# EAGLE board MiniWhip (EAGLE 7.7.0)
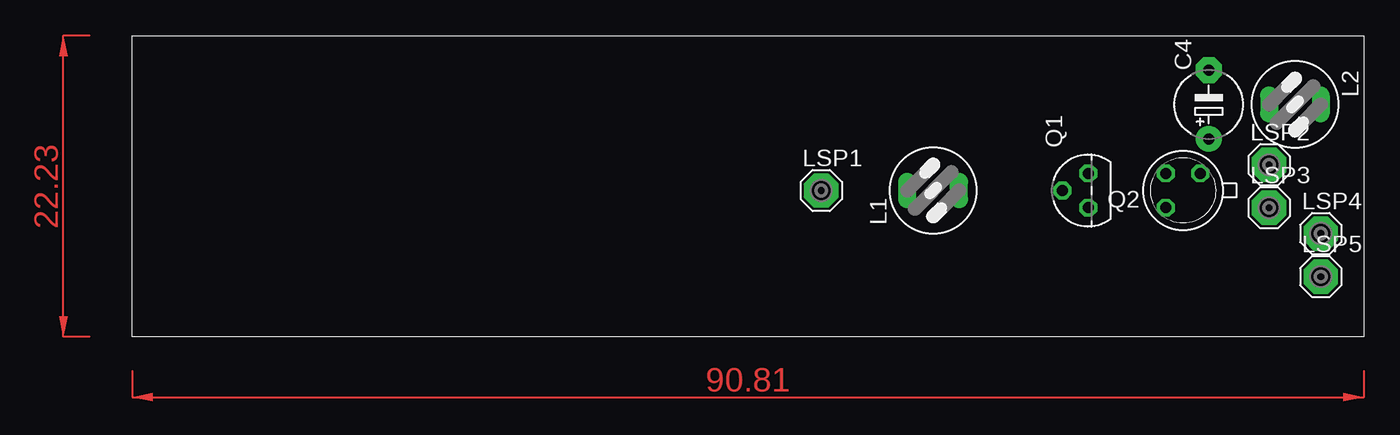
[diagram p0: board, top side]
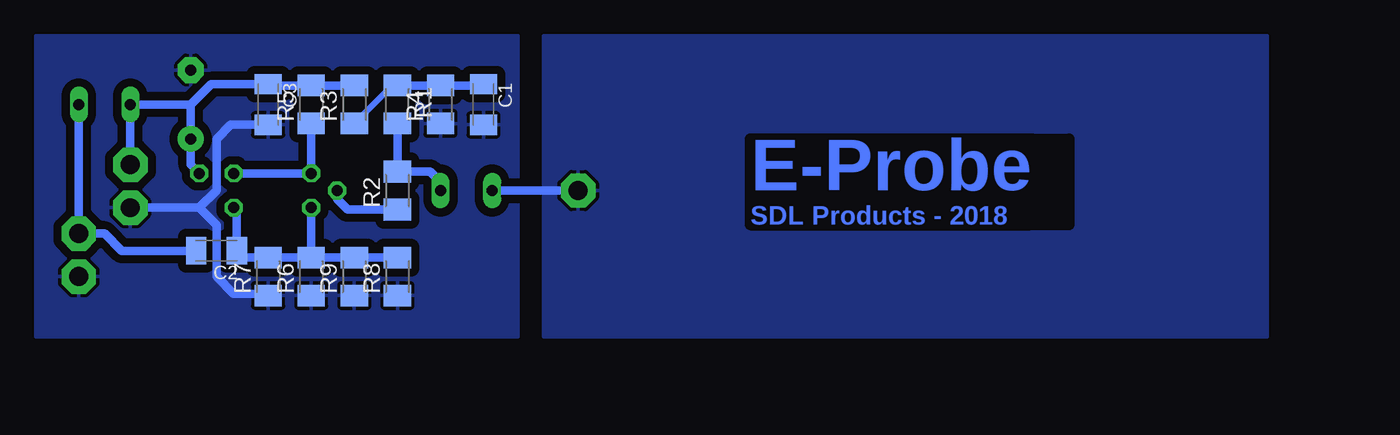
[diagram p1: board, bottom side, seen from below]

No outline drawn. Coordinates in mm, seen from the top.
Copper layers (1*16): Top 0.035mm / dielectric 1.5mm / Bottom 0.035mm
Design rules "default": minimum track width 10mil, minimum drill 24mil, track to track 8mil, track to pad 8mil, pad to pad 8mil, via to via 8mil, smd to smd 8mil, copper to edge 40mil, drill to drill 8mil, minimum pad ring 10mil, minimum via ring 8mil, stop-mask expansion 4mil, vias tented up to drill 0mil, thermal gap 10mil
bRestrict: area 14.6,8.3 to 38.1,14.6

## Footprints (pad centres in the part's own frame; a part is rotated, then mirrored left to right if it is on the bottom)
C1206K = smd 1.5 x 2: 1 -1.5,0; 2 1.5,0
E5-5 = drill 0.813 pad 1.905: + -2.54,0 | drill 0.813 pad 1.905 octagon: - 2.54,0
82114R = drill 0.813 long: 1 0,1.905; 2 0,-1.905
SE14 = drill 1.397 pad 2.54 octagon: MP 0,0
TO92F = drill 0.813 octagon: D 1.27,0; G 0,1.905; S -1.27,0
TO18 = drill 0.813 octagon: 1 -1.27,-1.27; 2 1.27,-1.27; 3 1.27,1.27
M1206 = smd 1.6 x 2: 1 -1.4,0; 2 1.4,0

## Placement (x,y rotation side)
C1  [C1206K]  57.78,17.14 270 bottom
C2  [C1206K]  77.47,6.35 180 bottom
C3  [C1206K]  73.66,17.14 270 bottom
C4  [E5-5]  79.38,17.14 90 top
L1  82114R  [82114R]  59.05,10.79 90 top
L2  82114R  [82114R]  85.72,17.14 270 top
LSP1  SE14  [SE14]  50.8,10.79 0 top
LSP2  SE14  [SE14]  83.82,12.7 0 top
LSP3  SE14  [SE14]  83.82,9.53 0 top
LSP4  SE14  [SE14]  87.63,7.62 0 top
LSP5  SE14  [SE14]  87.63,4.45 0 top
Q1  2N3819  [TO92F]  70.48,10.79 90 top
Q2  2N2907  [TO18]  77.47,10.79 180 top
R1  [M1206]  64.14,17.14 270 bottom
R2  [M1206]  64.14,10.79 90 bottom
R3  [M1206]  67.31,17.14 90 bottom
R4  [M1206]  60.96,17.14 90 bottom
R5  [M1206]  70.48,17.14 90 bottom
R6  [M1206]  70.48,4.45 90 bottom
R7  [M1206]  73.66,4.45 90 bottom
R8  [M1206]  64.14,4.45 90 bottom
R9  [M1206]  67.31,4.45 90 bottom

## Library data of the parts
C1-C4 R1-R9 = rcl
L1 L2 = inductors
LSP1-LSP5 = solpad
Q1 = transistor-small-signal
Q2 = transistor-pnp

## Nets
ANT: L1.1 LSP1.MP
GND: C1.2 C3.2 C4.- LSP3.MP LSP5.MP R4.1 R6.1 R7.1 R8.1 R9.1
N$1: L1.2 R1.2 R2.2
N$2: C1.1 R1.1 R3.1 R4.2
N$4: Q1.G R2.1
N$5: Q1.D Q2.2 R5.1
N$6: C2.1 Q1.S Q2.3 R6.2 R7.2 R8.2 R9.2
N$8: C2.2 L2.1 LSP4.MP
VCC: C3.1 C4.+ L2.2 LSP2.MP Q2.1 R3.2 R5.2

## Tracks (layer width: path | path; a pad name or v marks a point on that pad's centre or on a via)
ANT
  Bottom 0.61: L1.1 LSP1.MP
  pour Bottom (isolate 0.406): 53.34,22.23 53.34,0 0,0 0,22.23
GND
  Bottom 0.61: LSP3.MP 78.74,9.53 | 78.74,9.53 77.47,8.26 77.47,4.45 76.2,3.17 73.79,3.17 R7.1 | C3.2 76.43,15.64 77.47,14.61 77.47,10.79 78.74,9.53
  pour Bottom (isolate 0.61): 55.24,22.23 90.81,22.23 90.81,0 55.24,0
N$1
  Bottom 0.61: R1.2 R2.2 61.73,12.2 60.96,11.43 L1.2
N$2
  Bottom 0.406: R1.1 64.51,18.55 R3.1
  Bottom 0.61: R1.1 R4.2 57.88,18.55 C1.1
N$4
  Bottom 0.61: R2.1 67.81,9.39 68.58,10.16 Q1.G
N$5
  Bottom 0.61: Q2.2 Q1.D R5.1
N$6
  Bottom 0.61: Q1.S R6.2 | R8.2 R9.2 | R9.2 67.81,5.84 67.94,5.71 67.44,5.71 R9.2 | R6.2 R9.2 | R6.2 R7.2 75.47,5.84 C2.1 75.97,9.29 Q2.3
N$8
  Bottom 0.61: C2.2 84.45,6.35 85.72,7.62 LSP4.MP L2.1
VCC
  Bottom 0.61: R3.2 R5.2 73.56,18.55 C3.1 77.88,18.64 79.38,17.14 | 79.38,17.14 L2.2 LSP2.MP | Q2.1 79.38,12.7 C4.+ 79.38,17.14
(copper drawn outside any net)
  shapes: Top area x2

## Text on the board
Bottom: E-Probe | SDL Products - 2018